# Allegro board HUB_DEBUG.brd
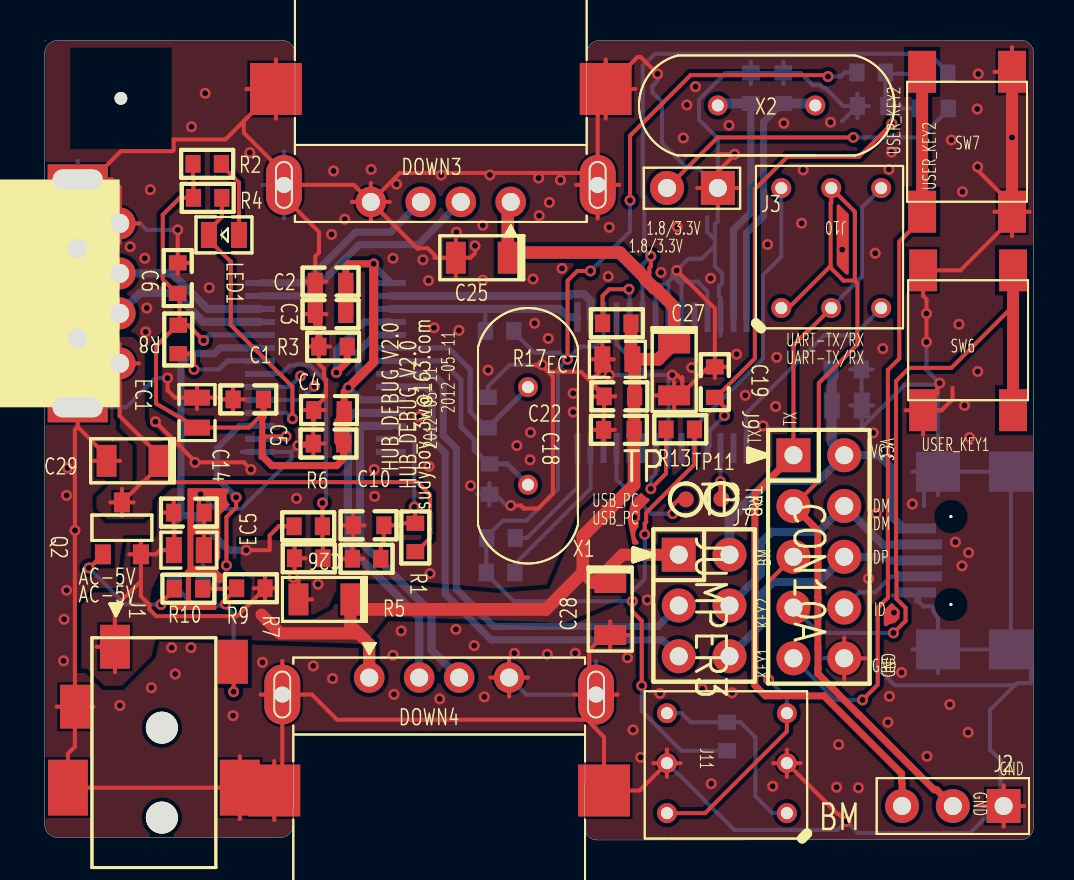
[diagram p0: board, top side]
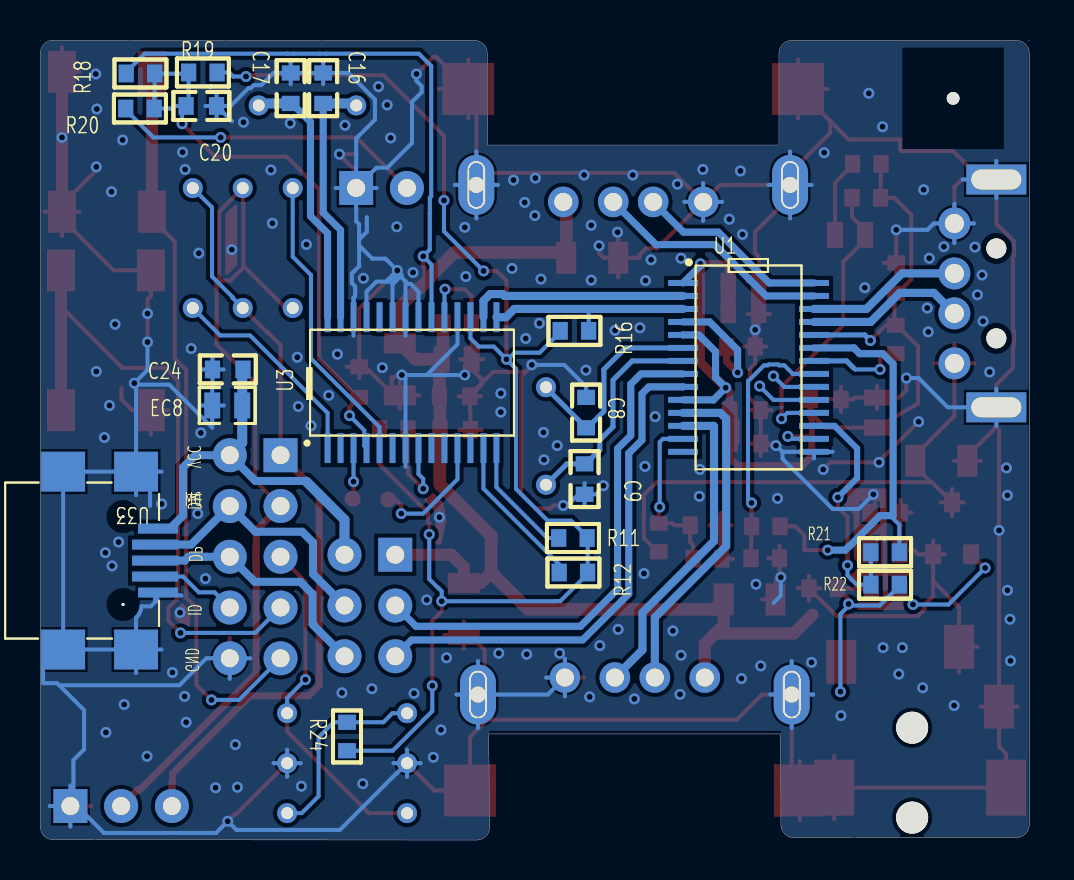
[diagram p1: board, bottom side, seen from below]

Outline 49.48 x 40.03 mm; copper layers: TOP, BOTTOM. Coordinates in mm from the lower left corner of the outline.
Outline path: 0,40 0.05,40 ; 49.48,40.03 49.48,40.02 ; 0,39.37 arc(0.19,39.82) 0.63,40 11.89,40.01 arc(12.34,39.82) 12.52,39.37 12.52,34.77 27.1,34.77 27.12,39.37 arc(27.31,39.82) 27.76,40 48.84,40.02 arc(49.29,39.83) 49.48,39.38 49.48,0.65 arc(49.29,0.2) 48.84,0.02 27.64,0 arc(27.19,0.19) 27.01,0.64 27.05,5.31 12.45,5.31 12.42,0.75 arc(12.24,0.31) 11.79,0.12 0.63,0.13 arc(0.19,0.31) 0,0.76 0,39.37

## Placement (name value [footprint] x y rotation side)
C1  0.1uF  [C0603]  10.19 22.05 0 top
C2  0.1uF  [C0603]  14.3 27.94 0 top
C3  0.1uF  [C0603]  14.3 26.31 0 top
C4  1uF  [C0603]  14.22 21.51 0 top
C5  0.1uF  [C0603]  14.2 19.84 0 top
C6  0.1uF  [C0603]  6.65 28.12 270 top
C8  20P  [C0603]  22.17 21.39 270 bottom
C9  20P  [C0603]  22.25 18.06 90 bottom
C10  0.1uF  [C0603]  16.21 15.75 0 top
C14  0.1uF  [C0603]  7.21 16.38 180 top
C16  20P  [C0603]  35.33 37.62 270 bottom
C17  20P  [C0603]  36.96 37.62 270 bottom
C18  0.1uF  [C0603]  28.73 20.52 0 top
C19  0.1uF  [C0603]  33.53 22.91 270 top
C20  0.1uF  [C0603]  41.43 36.73 0 bottom
C22  0.1uF  [C0603]  28.75 22.2 0 top
C24  0.1uF  [C0603]  40.11 23.55 180 bottom
C25  47uF  [CAP1206]  21.87 29.13 180 top
C26  47uF  [CAP1206]  14 12.04 180 top
C27  47uF  [CAP1206]  31.5 23.55 270 top
C28  47uF  [CAP1206]  28.3 11.56 270 top
C29  47uF  [CAP1206]  4.39 18.97 180 top
DOWN3  -  [USBH]  23.32 31.93 180 top
DOWN4  -  [USBH]  16.24 8.13 0 top
DOWN5  PC  [USBB-B]  3.75 23.85 270 top
EC1  10uF  [C0805]  7.62 21.39 90 top
EC5  10uF  [C0805]  7.21 14.5 0 top
EC7  10uF  [C0805]  28.65 24.05 180 top
EC8  10uF  [C0805]  40.13 21.74 0 bottom
J1  DC  [DC-PJK-111]  5.86 1.12 90 top
J2  CON3  [JUMP-3]  47.98 1.7 270 top
J3  UART_CNF  [JUMP-2]  33.68 32.63 180 top
J7  JUMPER3  [HDR254M-2X3]  31.72 14.27 270 top
J9  CON10A  [HDR254M-2X5]  37.46 19.25 270 top
J10  RX/TX  [SW_2_8X8]  36.86 26.62 180 top
J11  Boot  [SW_2_8X8]  37.13 1.35 270 top
LED1  PWR_LED  [D0805]  8.97 30.28 180 top
NOREF  -  [unnamed]  3.81 37.11 0 top
Q2  IRLML6401  [SOT-23]  3.86 15.59 0 top
R1  10K  [R0603]  18.54 15.14 270 top
R2  470R  [R0603]  8.13 33.83 180 top
R3  680R/1%  [R0603]  14.43 24.69 0 top
R4  100K  [R0603]  8.15 32.13 180 top
R5  47K  [R0603]  16.1 14.07 0 top
R6  10K  [R0603]  13.18 15.7 180 top
R7  20K  [R0603]  13.21 14.1 0 top
R8  1K  [R0603]  6.68 25.04 270 top
R9  510K  [R0603]  10.31 12.6 0 top
R10  4.7K  [R0603]  7.19 12.57 0 top
R11  4.7K  [R0603]  22.83 15.11 0 bottom
R12  4.7K  [R0603]  22.81 13.39 0 bottom
R13  0R/NC  [R0603]  31.8 20.55 180 top
R16  1.5K  [R0603]  22.76 25.48 180 bottom
R17  4.7K  [R0603]  28.63 25.86 180 top
R18  10K/NC  [R0603]  44.48 38.35 180 bottom
R19  10K  [R0603]  41.35 38.4 0 bottom
R20  12K  [R0603]  44.5 36.6 0 bottom
R21  4.7K  [R0603]  7.21 14.4 180 bottom
R22  0R/NC  [R0603]  7.21 12.78 0 bottom
R24  10K/NC  [R0603]  34.14 5.18 270 bottom
SW6  KEY1  [K6X6_SMD]  49.2 28.01 270 top
SW7  KEY2  [K6X6_SMD]  49.15 37.94 270 top
TP8  TP  [TP80]  33.86 17.07 0 top
TP11  TP  [TP80]  32.08 17.04 0 top
U1  GL850AUSB  [GL850AUSB_SSOP28]  17.32 27.87 180 bottom
U3  -  [PL2303-HX-SSOP]  35.11 19.61 90 bottom
U33  MID  [MINIUSB-5PIN]  45.34 11.78 270 bottom
X1  12MHz  [49SS]  24.18 22.66 270 top
X2  12MHz  [49SS]  38.56 36.75 180 top

## Library data of the parts
C1-C6 C8-C10 C14 C16-C20 C22 C24 = C-0603
C25-C29 = CAP: tolerance: +80%-20%
DOWN3 DOWN4 = USBA-A_1
DOWN5 = USBA-A_3
EC1 EC5 EC7 EC8 = CED-5-2_5
J1 = DC JACK_1
J2 = CON3
J3 = CON2
J7 = JUMPER3: User Part Number: partnum; Tolerance: RichardLC
J9 = CON10A: User Part Number: partnum; Tolerance: RichardLC
J10 J11 = SW_2
LED1 = LED-3mm_0
Q2 = PMOS
R1 R2 R4-R13 R16-R22 R24 = R-0603
R3 = R-0603 1%
SW6 SW7 = SW PUSHBUTTON-SPST-2/SM_1: room: KEYs
TP8 TP11 = T POINT R: User Part Number: partnum; Tolerance: RichardLC
U1 = GLI8024-48_3
U3 = PL-2303HX
U33 = USB-5PIN_1
X1 X2 = XD-49US-A

## Footprints (pads in the part's own frame, mm; a bottom-side part is the same pattern mirrored in y, then rotated)
49SS
  round 1 hole 0.6: 1(0,0) 2(4.88,0)
C0603
  rect 0.762x0.889 smd: 1(-0.762,0) 2(0.762,0)
C0805
  rect 0.8x1.3 smd: 1(-0.75,0) 2(0.75,0)
CAP1206
  rect 1x1.6 smd: 1(-1.299,0) 2(1.299,0)
D0805
  rect 0.8x1.3 smd: 1(-0.75,0) 2(0.75,0)
DC-PJK-111
  round 1.6 hole 1.6 unplated: (0,0) (4.5,0)
  rect 2.2x1.5 smd: 1(8.55,2.35) 2(5.55,4.35) 3(7.8,-3.55)
  rect 2.8x2 smd: 4(1.5,4.7) 5(1.5,-3.9)
GL850AUSB_SSOP28
  rect 1.5x0.3 smd: 1(0,0) 2(0,-0.65) 3(0,-1.3) 4(0,-1.95) 5(0,-2.6) 6(0,-3.25) 7(0,-3.9) 8(0,-4.55) 9(0,-5.2) 10(0,-5.85) 11(0,-6.5) 12(0,-7.15) 13(0,-7.8) 14(0,-8.45) 15(6.55,-8.45) 16(6.55,-7.8) 17(6.55,-7.15) 18(6.55,-6.5) 19(6.55,-5.85) 20(6.55,-5.2) 21(6.55,-4.55) 22(6.55,-3.9) 23(6.55,-3.25) 24(6.55,-2.6) 25(6.55,-1.95) 26(6.55,-1.3) 27(6.55,-0.65) 28(6.55,0)
HDR254M-2X3
  rect 1.7x1.7 hole 0.9: 1(0,0)
  round 1.7 hole 0.9: 2(0,2.54) 3(2.54,0) 4(2.54,2.54) 5(5.08,0) 6(5.08,2.54)
HDR254M-2X5
  rect 1.7x1.7 hole 0.9: 1(0,0)
  round 1.7 hole 0.9: 2(0,2.54) 3(2.54,0) 4(2.54,2.54) 5(5.08,0) 6(5.08,2.54) 7(7.62,0) 8(7.62,2.54) 9(10.16,0) 10(10.16,2.54)
JUMP-2
  rect 1.7x1.7 hole 0.9: 1(0,0)
  round 1.7 hole 0.9: 2(2.54,0)
JUMP-3
  rect 1.7x1.7 hole 0.9: 1(0,0)
  round 1.7 hole 0.9: 2(0,-2.54) 3(0,-5.08)
K6X6_SMD
  rect 2.1x1.4 smd: 1(-0.5,-0.75) 2(6.5,-0.75) 3(-0.5,-5.25) 4(6.5,-5.25)
MINIUSB-5PIN
  round 0.15 hole 0.9 unplated: (-4.4,0) (0,0)
  rect 0.5x2 smd: 1(-3.8,1.6) 5(-0.6,1.6)
  rect 0.5x2.3 smd: 2(-3,1.6) 3(-2.2,1.6) 4(-1.4,1.6)
  rect 2x2.2 smd: 6(-6.65,0.65) 7(2.25,0.65) 8(2.25,-3) 9(-6.65,-3)
PL2303-HX-SSOP
  rect 1.5x0.3 smd: 1(0,0) 2(0,-0.65) 3(0,-1.3) 4(0,-1.95) 5(0,-2.6) 6(0,-3.25) 7(0,-3.9) 8(0,-4.55) 9(0,-5.2) 10(0,-5.85) 11(0,-6.5) 12(0,-7.15) 13(0,-7.8) 14(0,-8.45) 15(6.55,-8.45) 16(6.55,-7.8) 17(6.55,-7.15) 18(6.55,-6.5) 19(6.55,-5.85) 20(6.55,-5.2) 21(6.55,-4.55) 22(6.55,-3.9) 23(6.55,-3.25) 24(6.55,-2.6) 25(6.55,-1.95) 26(6.55,-1.3) 27(6.55,-0.65) 28(6.55,0)
R0603
  rect 0.762x0.889 smd: 1(-0.712,0) 2(0.712,0)
SOT-23
  rect 0.8x1 smd: 1(-0.95,-1.3) 2(0.95,-1.3) 3(0,1.3)
SW_2_8X8
  round 1 hole 0.6: 1(0,0) 2(-2.5,0) 3(-5,0) 4(0,-6) 5(-2.5,-6) 6(-5,-6)
TP80
  round 0.8 smd: 1(0,0)
unnamed
  round 0.635 hole 3.175 unplated: (0,0)
USBB-B
  round 1 hole 1.15 unplated: (-5.75,-2.1) (-1.25,-2.1)
  round 1.6 hole 0.95: 1(0,0) 2(-2.5,0) 3(-4.5,0) 4(-7,0)
  rect 1.5x3 hole 1x2.5: 5(2.2,-2.1) 6(-9.2,-2.1)
USBH
  round 1.53 hole 0.9: 1(0,0) 2(2.5,0) 3(4.5,0) 4(7,0)
  oval 1.8x3 hole 0.8: 5(11.35,-0.85) 6(-4.35,-0.85)
  rect 2.6x2.6 smd: 7(11.75,-5.65) 8(-4.75,-5.65)

## Nets
AVDD: C1.2 C2.2 C3.2 C4.2 C5.2 C6.2 EC1.1 R2.2 R4.2 R8.1 U1.1(AVDD1) U1.5(AVDD2) U1.10(AVDD3) U1.16(DVDD) U1.24(V33)
DGND: C1.1 C2.1 C3.1 C4.1 C5.1 C6.1 C8.1 C9.1 C10.1 C14.1 C16.1 C17.1 C18.1 C19.1 C20.1 C22.1 C24.1 C25.2 C26.2 C27.2 C28.2 C29.2 DOWN3.4(GND) DOWN3.5(HAND1) DOWN3.6(HAND2) DOWN3.7(HAND3) DOWN3.8(HAND4) DOWN4.4(GND) DOWN4.5(HAND1) DOWN4.6(HAND2) DOWN4.7(HAND3) DOWN4.8(HAND4) DOWN5.4(GND) DOWN5.5(HAND1) DOWN5.6(HAND2) EC1.2 EC5.2 EC7.2 EC8.2 J1.2(3T) J1.4(HAND1) J1.5(HAND2) J2.1 J3.1 J9.10 J11.2 J11.5 R3.1 R5.1 R7.1 SW6.3 SW6.4 SW7.1 SW7.2 U1.15(GND) U3.7(GND#7) U3.18(GND#18) U3.21(NC2) U3.22(GP0) U3.23(GP1) U3.25(GND#25) U3.26(TEST) U33.5(GND) U33.6(SHGND1) U33.7(SHGND2) U33.8(SHGND3) U33.9(SHGND4)
VCC: C14.2 C18.2 C22.2 C25.1 C26.1 C27.1 C28.1 DOWN3.1(VCC) DOWN4.1(VCC) EC5.1 EC7.1 J1.1(1S) J7.1 Q2.2(SOURCE) R6.2 R9.2 R17.1 R18.1 R21.2 U1.23(V5) U3.20(VDD_5)
VDD3: R11.1 R12.1 R13.1 R16.1 R19.1 R24.2 U3.17(VO_33)
VDD_325: C19.2 C20.2 R18.2 R19.2 R20.1 U3.4(VDD_325)
B_VCC: C29.1 DOWN5.1(VCC) Q2.3(DRAIN) R1.2
BOOT: J9.5 J11.3 J11.4
CTS: TP11.1(TP) U3.11(CTS_N)
DC_DET: J1.3(2TS) R9.1 R10.2 R22.1
DCD: U3.10(DCD_N)
DM0: DOWN5.2(D-) U1.25(DM0)
DM1: DOWN3.2(D-) U1.27(DM1)
DM2: U1.2(DM2) U3.16(DM)
DM3: J7.3 U1.8(DM3)
DM4: DOWN4.2(D-) U1.11(DM4)
DP0: DOWN5.3(D+) U1.26(DP0)
DP1: DOWN3.3(D+) U1.28(DP1)
DP2: R16.2 U1.3(DP2) U3.15(DP)
DP3: J7.5 U1.9(DP3)
DP4: DOWN4.3(D+) U1.12(DP4)
DSR: U3.9(DSR_N)
DTR: U3.2(DTR_N)
OTG_DM: J7.4 J9.4 U33.2(D-)
OTG_DP: J7.6 J9.6 U33.3(D+)
OTG_ID: J9.8 U33.4(ID)
OTG_VDD: C24.2 EC8.1 J7.2 J9.2 U33.1(VCC)
OVCUR1#: R6.1 R7.2 U1.21(OVCUR1#)
PGANG: LED1.2 R4.1 U1.18(PGANG)
PSELF: R21.1 R22.2 U1.17(PSELF)
PWREN1: R8.2 U1.22(PWREN1)
RESET#: C10.2 R1.1 R5.2 U1.13(RESET#)
RI_N: U3.6(RI_N)
RREF: R3.2 U1.4(RREF)
RTS: TP8.1(TP) U3.3(RTS_N)
RXD: J10.4 U3.5(RXD)
RXD_J: J2.2 J9.3 J10.1 J10.5
SHTD: U3.12(SHTD_N)
TEST: U1.14(TEST)
TXD: J10.3 U3.1(TXD)
TXD_J: J2.3 J9.1 J10.2 J10.6
UART_CNF: J3.2 R20.2
USERKEY1: J9.7 SW6.1 SW6.2
USERKEY2: J9.9 SW7.3 SW7.4
X1: C8.2 U1.6(XTAL1) X1.1
X2: C9.2 U1.7(XTAL2) X1.2
N15274073: Q2.1(GATE) R10.1
N15289456: LED1.1 R2.1
N15714660: R12.2 U3.13(GP3)
N15714664: R11.2 U3.14(GP2)
N15714728: R17.2 U3.19(RESET_N)
N15714842: C16.2 U3.27(NC4) X2.2
N15714846: C17.2 U3.28(RESERVED) X2.1
N15715922: R13.2 U3.8(NC1)
N15756342: J11.1 J11.6 R24.1

Pads without a net: U1 19 20; U3 24

## Via types
v1: diameter 0.55, hole 0.3, TOP to BOTTOM, 195 vias

## Routing (per net, layer and track width the routed paths; a pad name or vN(x,y) marks a point on that pad's centre or on a via; arc(x,y) is an arc through that point)
AVDD: length 56.3
  TOP w0.203: R2.2 7.42,33.16 7.44,33.13 R4.2 6.76,32.13 5.91,31.28 5.91,28.04 6.59,27.36 C6.2 6.72,27.36 6.74,27.33 6.74,25.76 ; 6.74,25.76 R8.1 6.62,25.76 5.57,24.71 5.57,21.84 EC1.1 10.21,20.64 10.95,21.37 ; 6.74,25.76 7.19,25.76 v1(7.95,24.99) ; 10.88,20.17 10.91,20.2 v1(12.08,20.2)
  TOP w0.3: C1.2 10.95,21.16 10.88,21.09 10.88,20.17
  TOP w0.356: v1(15.19,22.63) 14.99,22.43 C4.2 ; C2.2 15.06,28.69 15.2,28.83 v1(16.46,28.83) ; 10.88,20.17 10.88,19.21 11.36,18.73 14.6,18.73 14.96,19.09 C5.2
  TOP w0.457: v1(15.19,22.63) 16.46,23.9 v1(16.46,28.83)
  TOP w0.762: C3.2 C2.2 ; C5.2 14.96,19.9 14.86,20 14.86,20.87 14.99,20.99 C4.2
  BOTTOM w0.203: U1.16 12.02,20.07 12.08,20.13 v1(12.08,20.2)
  BOTTOM w0.254: v1(7.95,24.99) 8.23,25.27 10.77,25.27 U1.24
  BOTTOM w0.356: U1.5 17.32,25.27 16.53,25.27 15.7,24.44 15.7,23.14 v1(15.19,22.63) 15.8,22.02 U1.10 ; v1(16.46,28.83) 16.46,28.73 U1.1
DGND: length 542.5
  TOP w0.203: J1.5 11.34,2.62 DOWN4.8 ; J1.5 9.76,1.04 ; J1.5 J1.4 1.16,4.33 1.51,4.68 J1.2 ; J1.5 9.76,4.2 ; 43.07,21.51 SW6.4 ; SW6.4 43.95,21.63 44.66,22.34 44.66,22.74 v1(44.78,22.86) ; SW6.4 44.83,21.51 ; SW6.4 43.95,20.28 ; SW6.4 44.88,21.51 45.42,22.05 45.42,22.62 ; C10.1 15.44,16.37 ; C10.1 14.88,15.75 ; C10.1 16,15.75 ; C10.1 15.44,14.8 15.39,14.74 R5.1 ; C22.1 27.99,22.26 26.83,23.42 25.19,23.42 ; C22.1 27.41,22.78 27.41,23.06 27.9,23.56 EC7.2 ; C22.1 27.43,22.2 ; C22.1 27.99,21.53 27.97,21.5 C18.1 ; C22.1 28.55,22.2 ; v1(10.31,18.54) 9.96,18.9 8.87,18.9 v1(7.52,18.9) 7.52,18.95 v1(5.54,20.93) ; C4.1 14.02,21.51 ; C4.1 13.44,21.49 13.44,19.9 ; C4.1 12.9,21.51 ; C4.1 13.46,20.89 ; C4.1 13.46,21.58 14.07,22.18 14.07,23.02 13.97,23.12 13.97,23.57 13.72,23.83 R3.1 ; SW7.2 49.28,31.44 ; SW7.2 48.4,32.66 ; SW7.2 47.52,31.44 ; SW7.2 48.4,30.21 ; SW7.2 48.4,31.09 45.82,28.51 SW6.3 43.95,27.23 44.12,27.06 v1(44.12,26.34) v1(44.12,24.92) ; 22.29,8.13 DOWN4.4 ; DOWN4.4 24.18,8.13 ; DOWN4.4 23.24,7.19 ; DOWN4.4 23.24,9.07 ; 13.54,27.94 13.54,29.21 13.72,29.39 13.72,30.42 11.97,32.18 DOWN3.5 ; 13.54,27.94 14.1,27.94 ; 13.54,27.94 12.98,27.94 ; J2.1 47.98,2.73 ; J2.1 49.01,1.7 ; J2.1 47.98,0.67 ; J2.1 46.95,1.7 ; DOWN4.6 11.89,8.96 ; DOWN4.6 13.37,7.28 14.63,6.02 27.12,6.02 ; DOWN4.6 11.89,2.88 DOWN4.8 ; DOWN4.6 10.81,7.28 ; 24.84,23.77 25.19,23.42 ; 24.84,23.77 24.82,23.75 24.56,23.75 24.59,23.77 24.84,23.77 ; 24.84,23.77 v1(24.89,23.77) ; 25.19,23.42 25.43,23.19 25.43,17.32 24.69,16.59 23.97,16.59 23.82,16.74 v1(23.32,16.74) ; J9.10 40,10.12 ; J9.10 41.03,9.09 ; J9.10 40,8.06 ; 10.09,37.58 DOWN3.7 ; DOWN3.7 9.96,35.97 ; DOWN3.7 11.57,39.06 ; DOWN3.7 11.57,36.1 ; J11.2 39.69,1.3 39.75,1.3 v1(40.11,0.94) ; J11.2 37.81,3.85 ; J11.2 37.13,3.17 ; J11.2 37.13,4.52 ; J11.2 36.46,3.85 ; v1(28.24,23.27) 28.24,23.71 28.22,23.73 ; 2.42,18.97 C29.2 ; C29.2 3.77,18.97 ; C29.2 3.09,19.22 1.65,20.67 ; 27.12,6.02 27.59,6.49 DOWN4.5 ; 27.12,6.02 27.99,5.15 DOWN4.7 29.77,2.48 J11.5 ; 9.96,35.97 9.96,35.38 11.97,33.38 DOWN3.5 ; 9.96,35.97 9.04,35.05 6.45,35.05 6.45,34.53 6.39,34.47 3.81,34.47 2.4,33.05 ; 27.41,20.52 C18.1 ; C18.1 28.52,20.52 ; C18.1 27.97,19.9 ; 48.4,31.79 46.69,33.5 v1(46.69,33.68) ; C6.1 6.59,28.88 ; C6.1 v1(6.65,30.53) ; C6.1 7.28,28.88 ; C6.1 6.65,28.32 ; DOWN3.8 27.67,37.18 27.67,33.38 ; DOWN3.8 29.55,37.58 ; DOWN3.8 28.07,39.06 ; DOWN3.8 28.07,36.1 ; DOWN3.8 29.67,39.18 29.81,39.18 v1(30.66,38.33) ; 1.65,20.67 DOWN5.5 1.65,22.79 0.81,23.62 0.81,24.69 0.77,24.74 0.77,25.46 0.81,25.51 0.81,29.19 0.77,29.24 0.77,29.96 1.65,30.84 DOWN5.6 2.4,33.05 ; 1.65,20.67 1.51,20.54 v1(1.51,15.49) J1.2 ; 30.52,22.25 C27.2 ; C27.2 31.8,22.25 33.22,23.67 C19.1 ; C27.2 31.9,22.65 31.9,23.01 ; C27.2 31.5,21.57 ; C27.2 31.5,22.92 ; 2.77,30.85 DOWN5.4 ; DOWN5.4 3.75,29.87 ; DOWN5.4 3.75,32.68 3.38,33.05 2.4,33.05 ; DOWN5.4 4.72,30.85 ; 13.16,24.69 R3.1 ; R3.1 14.27,24.69 ; 48.4,37.21 SW7.1 ; SW7.1 48.4,39.66 ; SW7.1 47.52,38.44 ; v1(6.15,23.11) 6.15,22.51 6.52,22.14 EC1.2 ; 31.13,3.17 J11.5 ; J11.5 31.81,3.85 ; J11.5 31.13,4.52 ; J11.5 30.46,3.85 ; C5.1 13.34,19.74 v1(12.67,19.74) ; C5.1 14,19.84 ; C5.1 12.73,19.84 12.67,19.79 12.65,19.79 ; C5.1 13.44,19.21 ; v1(7.8,17.3) 7.72,17.22 7.72,16.64 C14.1 7.98,15.71 7.96,15.7 EC5.2 ; 20.57,28.16 C25.2 ; C25.2 20.57,30.11 ; C25.2 21.3,29.13 21.53,29.36 v1(21.53,29.73) ; C25.2 19.5,29.13 19.5,29.27 19.16,29.61 18.68,29.61 18.66,29.59 DOWN3.4 ; DOWN3.5 15.47,32.78 DOWN3.4 ; 28.3,9.58 C28.2 ; C28.2 28,10.26 27.25,9.51 27.25,8.26 27.59,7.92 DOWN4.5 ; C28.2 29.27,10.26 ; C28.2 28.3,10.93 ; DOWN4.8 11.49,1 ; DOWN4.8 11.49,3.96 ; 0.58,6.67 J1.2 ; J1.2 2.44,6.67 ; DOWN3.4 17.77,33.38 27.67,33.38 ; DOWN3.4 15.37,31.93 ; DOWN3.4 16.32,30.98 ; DOWN3.4 17.26,31.93 ; DOWN3.4 16.32,32.87 ; R7.1 12.5,14.72 ; R7.1 13.05,14.1 ; R7.1 12.5,13.47 ; DOWN3.6 28.75,32.78 ; DOWN3.6 27.67,33.38 ; DOWN3.6 26.59,32.78 ; DOWN3.6 27.67,31.1 ; EC7.2 27.9,24.88 ; EC7.2 28.22,23.73 ; EC7.2 27.32,24.05 ; EC7.2 28.48,24.05 ; J3.1 33.68,33.45 34.54,34.31 v1(34.52,34.31) 33.66,34.31 ; J3.1 33.68,31.6 ; J3.1 32.65,32.63 ; J3.1 34.71,32.63 ; 7.62,21.56 EC1.2 ; EC1.2 8.72,22.14 8.81,22.05 C1.1 ; EC1.2 7.62,22.71 ; 31.9,23.01 31.9,23.16 ; 31.9,23.01 31.65,23.27 v1(31.39,23.27) ; C1.1 9.42,22.67 ; C1.1 9.42,21.42 ; C1.1 9.98,22.05 ; DOWN4.5 28.66,7.28 ; DOWN4.5 26.51,7.28 ; 13.54,25.69 13.54,26.31 ; 13.54,26.31 12.98,26.31 ; 13.54,26.31 14.1,26.31 ; 28.22,23.73 28.22,23.16 ; R5.1 15.95,14.07 ; R5.1 15.39,14.01 ; R5.1 14.83,14.07 ; v1(31.62,28.5) 33.53,26.59 C19.1 ; 33.53,23.11 C19.1 ; C19.1 34.15,23.67 ; 13.37,12.04 C26.2 12.7,13.02
  TOP w0.356: R3.1 v1(13.72,25.53) 13.72,26.14 13.54,26.31
  TOP w0.6: SW7.1 v1(48.4,35.15) SW7.2
  TOP w0.762: C5.1 13.44,19.9 ; 13.54,26.31 13.54,27.94
  BOTTOM w0.203: C20.1 41.22,36.73 ; C20.1 39.96,36.73 39.07,37.62 38.95,37.62 38.8,37.77 38.43,37.77 37.82,38.38 C17.1 ; C20.1 40.67,36.11 ; C20.1 39.9,35.97 39.9,35.97 ; C20.1 40.67,37.35 ; 27.67,31.1 DOWN3.6 ; DOWN3.6 28.75,32.78 ; DOWN3.6 27.67,34.46 ; DOWN3.6 26.59,32.78 ; 15.37,31.93 DOWN3.4 ; DOWN3.4 16.32,32.87 ; DOWN3.4 16.32,30.98 ; DOWN3.4 17.26,31.93 ; U3.7 31.21,23.08 v1(31.39,23.27) 30.15,23.27 ; U3.7 31.21,20.54 ; U3.7 31.21,18.68 ; U3.21 30.56,27.44 30.94,27.82 31.08,27.82 31.42,28.16 31.42,28.29 v1(31.62,28.5) ; DOWN4.5 27.59,8.96 ; DOWN4.5 28.66,7.28 ; DOWN4.5 27.59,5.6 ; DOWN4.5 24.09,7.28 DOWN4.4 ; 12.8,11.86 12.43,12.23 v1(12.43,13.14) ; U3.25 33.16,27.44 33.08,27.53 33.08,27.53 32.74,27.86 32.66,27.94 32.13,27.94 ; 31.86,27.8 U3.23 ; 31.86,27.8 31.86,28.26 ; 31.86,27.8 31.72,27.94 ; 43.99,16.71 43.99,17.73 U33.6 ; 44.69,8.35 U33.7 ; U33.7 43.42,9.53 ; U33.7 U33.8 ; U33.7 44.69,11.12 44.62,11.19 44.52,11.34 44.45,11.51 44.42,11.69 43.96,11.69 43.74,11.9 U33.5 ; J2.1 49.01,1.7 ; J2.1 47.65,1.7 ; J2.1 47.98,2.73 ; J2.1 47.98,0.67 ; 9.84,19.42 U1.15 ; U1.15 12.34,19.42 ; U1.15 10.77,19.09 ; J3.1 34.71,32.63 ; J3.1 33.68,35.1 32.74,36.04 32.74,37.05 34.07,38.38 C16.1 ; J3.1 33.68,31.55 33.68,31.54 33.68,30.95 33.53,30.81 33.53,30.05 ; J3.1 32.65,32.63 ; J3.1 32.67,33.64 32.12,33.64 30.89,34.87 30.89,36.93 30.4,37.41 30.4,37.72 30.66,37.98 v1(30.66,38.33) ; 38.98,9.09 J9.10 ; J9.10 41.17,9.09 42.52,7.75 48.54,7.75 ; J9.10 40,8.06 ; 31.21,25.23 U3.22 ; U3.22 31.21,27.09 ; U3.22 31.21,27.95 ; J11.5 31.65,3.33 31.67,3.33 34.49,0.51 39.67,0.51 v1(40.11,0.94) 40.69,0.35 46.3,0.35 47.65,1.7 ; J11.5 31.13,4.52 ; J11.5 31.13,3.17 ; J11.5 31.81,3.85 ; J11.5 30.46,3.85 ; 31.72,27.94 32.13,27.94 ; 31.72,27.94 31.42,28.24 ; 31.72,27.94 31.72,28.4 ; 32.13,27.94 32.13,27.99 31.86,28.26 ; 12.34,19.42 12.34,19.07 9.83,16.56 8.53,16.56 v1(7.8,17.3) ; 12.34,19.42 12.66,19.74 v1(12.67,19.74) ; C24.1 41.43,23.55 ; C24.1 40.87,22.63 40.88,22.62 EC8.2 ; C24.1 40.87,24.17 ; C24.1 40.31,23.55 ; 30.15,23.27 28.61,24.8 U3.18 ; 30.15,23.27 v1(28.24,23.27) ; v1(24.89,23.77) 23.27,23.77 22.17,22.68 C8.1 ; 48.54,7.75 47.29,6.5 47.29,4.53 47.83,4 47.83,1.88 47.65,1.7 ; 48.54,7.75 48.64,7.85 49.35,7.85 49.35,8.71 47.85,8.71 47.85,9.04 U33.8 ; DOWN4.4 23.24,7.19 ; DOWN4.4 23.24,9.07 ; DOWN4.4 24.18,8.13 ; C16.1 35.33,38.94 ; C16.1 35.33,37.82 ; C16.1 C17.1 ; 11.89,5.6 DOWN4.6 ; DOWN4.6 10.81,7.28 ; DOWN4.6 12.96,7.28 ; DOWN4.6 11.89,8.96 ; DOWN5.5 4.07,21.65 5.54,23.11 v1(6.15,23.11) ; DOWN5.5 1.65,20.72 ; DOWN5.5 1.65,22.58 ; 33.15,31.17 33.15,30.43 33.53,30.05 ; DOWN5.6 3.32,33.05 ; DOWN5.6 1.65,32.12 ; DOWN5.6 1.65,33.98 ; 31.72,28.4 31.86,28.26 ; 31.72,28.4 v1(31.62,28.5) ; U33.6 U33.9 U33.8 ; U33.6 43.42,18.43 ; U33.6 44.69,22.77 44.7,22.78 ; U33.6 44.69,17.25 ; 43.59,11.95 U33.5 ; U33.5 42.42,12.23 ; v1(31.62,28.5) 32.21,29.09 32.87,29.09 33.53,29.75 ; v1(23.32,16.74) 23.11,16.74 22.56,17.3 C9.1 ; DOWN3.5 13.05,32.78 ; DOWN3.5 11.97,34.46 ; DOWN3.5 10.89,32.78 ; DOWN3.5 11.97,31.1 ; 40.3,21.74 EC8.2 ; EC8.2 41.46,21.74 ; EC8.2 40.88,20.64 43.03,22.78 44.7,22.78 ; C17.1 36.96,37.82 ; C17.1 36.96,38.94 ; 44.7,22.78 v1(44.78,22.86) 44.12,23.52 v1(44.12,24.92) ; 33.53,29.75 33.53,28.71 33.81,28.43 33.9,28.35 33.9,27.86 33.73,27.7 33.73,27.22 33.81,27.14 U3.26 ; 33.53,29.75 33.53,30.05 ; J11.2 37.81,3.85 ; J11.2 37.13,4.52 ; J11.2 37.13,3.17 ; J11.2 36.46,3.85 ; U3.26 33.81,27.09 ; U3.26 33.81,25.23 ; 2.77,30.85 DOWN5.4 ; DOWN5.4 4.78,30.85 5.09,30.53 v1(6.65,30.53) ; DOWN5.4 3.75,29.87 ; DOWN5.4 3.75,31.83 ; C9.1 22.25,17.86 ; C9.1 22.25,16.74 ; C9.1 21.63,17.3
  vias: v1(0.94,8.97) v1(0.97,11.05) v1(1.14,18.62) v1(1.09,17.25) v1(1.09,12.5) v1(1.98,23.42) v1(2.31,25.96) v1(2.36,28.27) v1(2.59,27.28) v1(2.72,29.67) v1(3.76,6.73) v1(4.27,29.68) v1(5,29.11) v1(5.05,25.42) v1(5.11,26.62) v1(5.28,32.54) v1(5.33,7.62) v1(6.35,9.63) v1(6.53,8.31) v1(7.34,35.69) v1(7.32,9.63) v1(8.03,37.36) v1(8.23,27.63) v1(9.42,6.22) v1(10.26,34.39) v1(10.9,8.89) v1(12.6,17.09) v1(13.44,8.71) v1(13.67,12.8) v1(14.35,30.3) v1(14.45,33.48) v1(14.4,8.08) v1(15.01,31.06) v1(16.33,33.55) v1(16.48,18.54) v1(16.51,17.2) v1(17.42,29.11) v1(17.42,9.24) v1(17.48,7.29) v1(17.6,32.82) v1(17.83,10.46) v1(18.72,21.18) v1(18.92,29.03) v1(19.2,27.99) v1(19.23,18.69) v1(19.28,13.33) v1(19.48,25.63) v1(19.84,33.27) v1(19.76,7.06) v1(20.6,30.41) v1(20.57,10.54) v1(20.73,25.5) v1(21.31,17.73) v1(21.49,9.73) v1(21.92,30.76) v1(21.92,28.02) v1(22,7.16) v1(22.18,23.51) v1(22.28,33.27) v1(23.5,9.34) v1(23.62,19.74) v1(24.31,20.4) v1(24.28,19.02) v1(24.43,28.07) v1(24.51,25.86) v1(24.71,33.12) v1(24.74,31.24) v1(25.15,9.3) v1(25.25,31.9) v1(25.2,25.09) v1(25.81,33.02) v1(25.88,28.6) v1(26.44,22.35) v1(26.44,21.41) v1(26.54,9.35) v1(28.24,30.66) v1(28.19,28.19) v1(29.16,9.12) v1(29.44,5.51) v1(29.51,16.15) v1(29.82,4.14) v1(30.15,12.01) v1(30.84,28.4) v1(30.78,7.34) v1(31.65,30.68) v1(31.95,35.13) v1(32.13,36.78) v1(32.37,23.63) v1(32.56,37.69) v1(32.89,7.57) v1(33.32,28.11) v1(33.35,2.82) v1(34.24,35.76) v1(34.39,7.37) v1(34.62,24.31) v1(35.05,22.25) v1(35.94,20.73) v1(36.17,29.79) v1(36.42,2.69) v1(36.63,24.15) v1(36.58,21.69) v1(36.98,35.86) v1(37.95,33.53) v1(37.87,30.86) v1(39.32,35.91) v1(39.62,2.64) v1(39.73,4.77) v1(39.9,29.54) v1(40.72,2.62) v1(41.22,13.08) v1(41.45,20.37) v1(41.55,29.36) v1(41.61,16.33) v1(41.94,24.59) v1(42.24,33.55) v1(42.19,5.89) v1(42.27,7.19) v1(42.37,34.42) v1(42.49,11.38) v1(42.88,8.38) v1(43.41,16.81) v1(44.15,4.19) v1(45.29,6.78) v1(45.36,35.03) v1(45.57,14.91) v1(45.75,25.81) v1(45.92,32.44) v1(45.9,13.72) v1(46.02,21.74) v1(46.23,14.38) v1(46.2,5.38) v1(46.28,20.14) v1(46.71,38.33) v1(46.66,36.58) v1(46.69,23.44)
VCC: length 135
  TOP w0.203: Q2.2 4.81,14.97 ; Q2.2 4.81,12.95 ; Q2.2 4.23,14.29 ; Q2.2 5.55,14.29 5.76,14.5 EC5.1 6.46,15.7 6.45,15.71 C14.2 ; R9.2 9.63,11.21 5.58,11.21 5.24,11.54 5.24,11.77 4.81,12.2 4.81,12.95 ; R9.2 10.47,12.6 ; R9.2 11.58,12.6 ; R9.2 11.02,13.22 ; R9.2 11.02,11.98 ; 9.93,14.36 10.07,14.5 v1(10.08,14.5) 11.23,14.5 11.25,14.53 11.25,15.24 11.71,15.7 R6.2 ; 4.81,12.95 3.51,11.65 J1.1 ; v1(30.33,29.21) 30.33,28.71 30.26,28.64 30.26,28.34 30.04,28.13 ; 5.89,16.38 C14.2 ; C14.2 6.45,17 ; J1.1 3.51,8.39 ; J1.1 3.51,10.95 ; J1.1 2.58,9.67
  TOP w0.6: J7.1 28.91,14.27 28.3,13.66 C28.1 27.45,12.86 26.92,13.39
  TOP w0.61: 15.7,10.34 15.29,10.74 C26.1 ; 15.7,10.34 11.79,10.34 10.85,11.28 ; 15.7,10.34 16.24,9.8 DOWN4.1
  TOP w0.635: 23.17,29.43 23.21,29.4 28.77,29.4 30.04,28.13 30.04,28.07 30.51,27.6 30.56,27.6 31.5,26.67 C27.1 30.7,24.05 EC7.1 ; 23.17,29.43 23.17,31.78 DOWN3.1 ; 23.17,29.43 C25.1 ; EC7.1 29.51,23.94 C22.2 29.49,22.17 C18.2 29.49,17.78 26.92,15.21 26.92,13.39 25.08,11.54 15.79,11.54 C26.1 ; EC7.1 29.34,24.12 R17.1
  BOTTOM w0.203: R21.2 6.5,15.78 6.81,16.09 6.81,16.23 ; R18.1 45.19,38.42 44.26,39.34 37.13,39.34 35.5,39.34 30.54,39.34 29.93,38.73 29.93,32.21 29.99,32.14 29.99,31.37 30,31.36 30,29.54 v1(30.33,29.21) 29.91,28.79 U3.20
  BOTTOM w0.356: v1(10.08,14.5) 9.21,14.5 9,14.71 8.99,14.71 8.38,15.32 8.38,15.32 7.47,16.23 6.81,16.23 6.81,23.82 7.33,24.33 8.48,24.33 8.77,24.62 U1.23
VDD3: length 73.8
  TOP w0.203: R13.1 32.51,18.8 30.09,16.38 30.09,15.91 30.02,15.84 v1(30.02,15.29) ; v1(26.16,24.05) 26.16,27.99 26.65,28.47 v1(27.3,28.47) ; v1(29.4,11.95) 29.4,11.44 29.87,10.97 v1(29.87,7.72) ; v1(39.19,38.2) 39.12,38.27 32.32,38.27 29.82,35.77 29.29,35.24 v1(29.29,32)
  BOTTOM w0.203: R24.2 31.85,4.47 29.87,6.45 v1(29.87,7.72) ; U3.17 27.96,25.1 27.54,24.69 26.8,24.69 v1(26.16,24.05) ; v1(27.3,28.47) 29.29,30.45 v1(29.29,32) ; v1(26.16,24.05) 25.68,23.57 25.68,17.56 24.09,15.98 22.92,15.98 22.12,15.18 R11.1 22.12,15.05 22.1,15.02 R12.1 22.1,13.32 23.46,11.96 23.68,11.96 23.69,11.95 v1(29.4,11.95) 29.4,12.45 29.55,12.6 29.57,12.6 30.02,13.05 v1(30.02,15.29) ; v1(26.16,24.05) 26.09,24.05 25.76,24.38 24.5,24.38 23.47,25.41 R16.1 ; v1(39.19,38.2) 39.83,38.2 40.03,38.4 R19.1
VDD_325: length 30.4
  TOP w0.203: v1(34.01,21.23) 34.01,21.67 C19.2 33.59,22.15 35.53,24.09 35.53,32.56 37.16,34.19 40.74,34.19 v1(42.39,35.84)
  BOTTOM w0.203: v1(42.39,35.84) 42.39,36.52 C20.2 ; U3.4 33.27,19.72 33.27,20.5 v1(34.01,21.23) ; C20.2 42.06,36.85 42.06,38.34 ; C20.2 42.8,36.73 42.93,36.6 R20.1 43.79,37.19 43.76,37.21 R18.2 43.75,38.34 42.06,38.34 ; 42.06,38.34 R19.2
B_VCC: length 31.8
  TOP w0.203: DOWN5.1 4.72,23.85 ; DOWN5.1 3.75,24.83 ; DOWN5.1 2.77,23.85 ; DOWN5.1 3.75,21.22 5.69,19.27 C29.1 5.69,18.67 4.93,17.91 ; R1.2 18.61,14.43 19.28,15.1 19.28,15.33 19.29,15.34 19.29,16.36 19.28,16.37 19.28,17.27 18.64,17.91 4.93,17.91 ; Q2.3 4.87,17.91 4.93,17.91 ; Q2.3 3.28,16.89 ; Q2.3 4.44,16.89 ; Q2.3 3.86,16.22 ; Q2.3 3.86,17.57
BOOT: length 17.3
  TOP w0.203: v1(36.22,8.03) 36.22,12.93 J9.5 ; J11.3 37.13,5.43 33.05,1.35 J11.4
  BOTTOM w0.203: v1(36.22,8.03) 37.13,7.11 J11.3
CTS: length 6.3
  TOP w0.203: TP11.1 31.72,17.04 31.42,16.75 v1(31.42,16.33)
  BOTTOM w0.203: U3.11 28.61,18.05 30.33,16.33 v1(31.42,16.33)
DC_DET: length 11.8
  TOP w0.203: v1(9.04,11.81) 9.04,12.04 R9.1 8.99,12.6 8.97,12.57 R10.2 ; J1.3 9.43,8.92 9.45,8.9 v1(9.45,7.42)
  BOTTOM w0.203: 9.04,11.71 9.02,11.73 7.48,11.73 6.5,12.71 R22.1 ; 9.04,11.71 9.45,11.3 v1(9.45,7.42) ; 9.04,11.71 v1(9.04,11.81)
DM0: length 8.1
  BOTTOM w0.406: U1.25 7.94,25.92 6.48,27.38 4.77,27.38 DOWN5.2
DM1: length 12
  BOTTOM w0.356: DOWN3.2 18.68,29.79 15.74,29.79 13.17,27.22 U1.27
DM2: length 11
  BOTTOM w0.406: U3.16 27.31,26.98 26.98,27.32 26.34,27.32 26.25,27.22 U1.2
DM3: length 25.7
  BOTTOM w0.356: J7.3 30.68,10.69 22.45,10.69 20.6,12.55 20.6,19.58 19.94,20.24 19.94,22.81 19.43,23.32 U1.8
DM4: length 16.7
  BOTTOM w0.406: U1.11 15.45,21.37 15.16,21.08 15.16,14.71 18.74,11.13 DOWN4.2
DP0: length 7.8
  BOTTOM w0.406: DOWN5.3 6.37,28.35 8.15,26.57 10.77,26.57 U1.26
DP1: length 9.7
  BOTTOM w0.356: DOWN3.3 17.31,30.42 15.56,30.42 13.01,27.87 U1.28
DP2: length 10.6
  BOTTOM w0.203: 22.05,26.57 22.05,26.57 R16.2
  BOTTOM w0.406: U1.3 25.77,26.57 26.18,26.16 U3.15
DP3: length 25.5
  BOTTOM w0.356: J7.5 30.91,10.01 22.35,10.01 20.37,11.99 20.04,12.32 20.04,19.35 19.38,20.01 19.38,22.33 19.03,22.67 17.32,22.67 U1.9
DP4: length 16.2
  BOTTOM w0.406: U1.12 15.8,20.72 15.77,20.7 15.77,14.96 19.35,11.38 19.35,9.51 DOWN4.3
Net_1: length 3
  BOTTOM w0.203: 10.77,22.02 12.8,22.02 v1(13.49,22.71)
Net_2: length 2.3
  BOTTOM w0.203: 10.77,22.67 10.77,22.67 12.26,22.67 v1(12.8,23.21)
OTG_DM: length 13.3
  BOTTOM w0.4: U33.2 41.94,14.78 J9.4 38.72,15.43 36.38,15.43 35.84,14.88 35.84,13.31 J7.4
OTG_DP: length 12.5
  BOTTOM w0.4: J7.6 35.79,10.72 35.79,10.73 35.86,10.81 35.86,12.31 36.47,12.92 38.75,12.92 J9.6 41.18,14.17 42.08,14.17 42.27,13.98 U33.3
OTG_ID: length 4.4
  BOTTOM w0.203: U33.4 42.34,13.18 41.56,12.4 40.77,12.4 J9.8
OTG_VDD: length 20.1
  BOTTOM w0.4: 36.17,17.93 36.2,17.97 38.72,17.97 J9.2 41.73,19.25 42.34,18.64 42.34,16.23 42.99,15.58 U33.1
  BOTTOM w0.5: J9.2 39.38,19.88 EC8.1 39.38,23.44 39.34,23.48 C24.2 ; 36.17,17.93 34.26,16.03 J7.2
OVCUR1#: length 12.8
  TOP w0.203: R7.2 13.92,15 13.89,15.02 R6.1 v1(13.89,16.86)
  BOTTOM w0.203: v1(13.89,16.86) 14.07,17.04 14.07,22.95 13.27,23.75 13.09,23.75 13.04,23.79 12.56,23.79 12.51,23.75 12.25,23.75 11.83,23.32 U1.21
PGANG: length 14.8
  TOP w0.203: v1(12.4,21.08) 12.4,22.68 9.31,25.77 9.31,28.93 8.22,30.03 LED1.2 8.22,30.53 8.87,31.18 R4.1
  BOTTOM w0.203: v1(12.4,21.08) 12.1,21.37 U1.18
PSELF: length 12.6
  TOP w0.203: v1(9.09,13.74) 9.09,16.16 9.58,16.64 v1(9.58,17.14)
  BOTTOM w0.203: v1(9.09,13.74) 9.09,13.24 8.63,12.78 R22.2 R21.1 7.93,14.43
  BOTTOM w0.305: U1.17 9.74,20.72 8.61,19.6 8.61,18.11 v1(9.58,17.14)
PWREN1: length 5
  TOP w0.203: v1(7.47,23.55) 7.47,24.29 7.43,24.33 R8.2
  BOTTOM w0.203: 8.78,23.62 8.71,23.55 v1(7.47,23.55)
  BOTTOM w0.254: U1.22 10.77,23.97 9.14,23.97 8.78,23.62
RESET#: length 8.7
  TOP w0.203: R5.2 16.82,14.74 16.97,14.9 C10.2 17.77,15.75 17.87,15.85 R1.1 18.54,16.61 v1(18.49,16.66)
  BOTTOM w0.203: v1(18.49,16.66) 18.49,19.91 18.33,20.07 U1.13
RREF: length 6
  TOP w0.356: R3.2 15.14,23.94 v1(14.59,23.39)
  BOTTOM w0.356: U1.4 15.99,25.92 14.59,24.52 v1(14.59,23.39)
RTS: length 2.6
  TOP w0.203: v1(33.81,17.93) 33.81,17.11 TP8.1
  BOTTOM w0.203: U3.3 v1(33.81,17.93)
RXD: length 14.8
  BOTTOM w0.203: J10.4 36.86,29.18 35.94,28.27 35.94,24.09 32.51,20.66 U3.5
RXD_J: length 45
  TOP w0.203: 40.54,27.99 40.54,31.44 J10.5 39.36,31.89 39.32,31.86 39.32,28.73 ; 40.54,27.99 40.67,27.86 40.67,24.79 38.74,22.86 38.74,22.68 38.73,17.98 J9.3 ; 40.54,27.99 39.97,27.99 39.32,28.63 39.32,28.73 ; 39.32,28.73 37.22,26.62 J10.1
  TOP w0.35: J9.3 38.69,15.48 38.68,15.48 38.68,14.69 38.69,14.68 38.69,13.66 38.68,13.65 38.68,12.15 38.69,12.14 38.69,11.12 38.68,11.11 38.68,9.61 38.69,9.6 38.69,8.58 38.68,8.57 38.68,8.32 40.73,6.27 40.74,6.27 44.5,2.52 44.63,2.52 J2.2
TXD: length 10.7
  BOTTOM w0.203: J10.3 40.48,25.25 38.99,25.25 35.11,21.37 U3.1
TXD_J: length 38.3
  TOP w0.203: J9.1 37.46,24.76 38.13,25.42 38.16,25.42 J10.2
  TOP w0.35: J9.1 35.53,17.32 35.53,7.74 36.06,7.21 36.76,7.21 36.77,7.22 37.5,7.22 37.51,7.21 38.99,7.21 42.88,3.33 42.88,2.88 42.9,2.85 J2.3
  BOTTOM w0.203: J10.6 40.89,31.66 40.89,28.19 39.87,27.17 39.87,27.13 J10.2
UART_CNF: length 15.8
  TOP w0.203: v1(40.46,35.15) 33.67,35.15 J3.2
  BOTTOM w0.203: R20.2 45.21,36.54 43.83,35.15 v1(40.46,35.15)
USERKEY1: length 33
  TOP w0.203: v1(42.47,10.36) 43.07,10.97 43.07,11.62 42.62,12.07 42.62,13.41 42.6,13.43 42.6,22.96 43.26,23.62 45.36,23.62 48.45,26.71
  TOP w0.6: SW6.1 SW6.2
  BOTTOM w0.203: v1(42.47,10.36) 38.73,10.36 J9.7
USERKEY2: length 37
  TOP w0.203: v1(40.92,7.01) 41.68,7.77 41.68,10.99 41.68,11.61 42.19,12.12 42.19,23.13 42.19,23.52 42.76,24.09 42.76,29.95 43.9,31.09 SW7.4
  TOP w0.6: SW7.4 SW7.3
  BOTTOM w0.203: v1(40.92,7.01) 39.55,7.01 J9.9
X1: length 10.6
  BOTTOM w0.254: U1.6 20.21,24.62 21.29,23.55 21.29,21.45 22.11,20.62 C8.2 24.18,22.63 X1.1
X2: length 11.1
  BOTTOM w0.254: U1.7 17.32,23.97 19.87,23.97 20.83,23.01 20.83,20.67 21.49,20.01 21.49,19.52 22.19,18.82 C9.2 23.14,18.82 X1.2
N15274073: length 6.4
  TOP w0.203: v1(5.82,11.78) 5.82,11.86 6.48,12.52 R10.1 ; Q2.1 2.23,13.61 v1(2.21,13.61)
  BOTTOM w0.203: v1(5.82,11.78) 4.04,11.78 v1(2.21,13.61)
N15289456: length 3.9
  TOP w0.203: LED1.1 9.72,32.89 8.84,33.77 R2.1
N15714660: length 7.8
  BOTTOM w0.203: U3.13 27.31,17.58 23.52,13.79 R12.2
N15714664: length 6.1
  BOTTOM w0.203: U3.14 26.66,17.65 24.12,15.11 R11.2
N15714728: length 4.2
  TOP w0.203: R17.2 27.91,27.23 28.24,27.56 v1(29.24,27.56)
  BOTTOM w0.203: U3.19 29.26,27.53 v1(29.24,27.56)
N15714842: length 12.8
  BOTTOM w0.356: U3.27 34.46,30.52 35.33,31.39 C16.2
  BOTTOM w0.5: X2.2 33.78,36.85 C16.2
N15714846: length 13.1
  BOTTOM w0.356: C17.2 36.89,36.85 35.97,35.93 35.97,31.22 35.11,30.36 U3.28
  BOTTOM w0.5: C17.2 38.46,36.85 X2.1
N15715922: length 5.4
  TOP w0.203: R13.2 31.09,18.34 v1(30.33,17.57)
  BOTTOM w0.203: v1(30.33,17.57) 30.33,18.08 30.56,18.31 U3.8
N15756342: length 9.8
  BOTTOM w0.203: J11.6 31.86,6.35 32.32,5.89 R24.1 34.81,5.89 35.56,5.14 35.56,2.19 36.41,1.35 J11.1

## Copper pours and planes (outline as drawn; the poured copper is in the pictures)
DGND on TOP (solid shape): 39.69,31.81 39.72,31.81 39.75,31.8 40.23,31.31 40.23,28.35 40.22,28.31 40.18,28.3 40.09,28.3 39.63,28.76 39.63,31.73 39.66,31.76 39.66,31.78 39.68,31.8
DGND on TOP (solid shape): outline of 111 points within 5.96,11.51 9.27,17.6
DGND on TOP: outline of 1232 points within 0.03,0.03 49.45,39.99
DGND on BOTTOM: 27.64,0.03 27.21,0.21 27.04,0.64 27.08,5.34 12.42,5.34 12.39,0.75 12.22,0.33 11.79,0.15 0.63,0.16 0.21,0.33 0.03,0.76 0.03,39.37 0.21,39.8 0.64,39.97 11.89,39.98 12.32,39.8 12.49,39.37 12.49,34.74 27.13,34.74 27.15,39.37 27.33,39.8 27.76,39.97 48.84,39.99 49.27,39.81 49.45,39.38 49.45,0.65 49.27,0.23 48.84,0.05 ; 9 cut-outs
VCC on TOP: 1.9,8.58 2.11,8.58 2.97,7.72 3.86,7.72 5.33,9.19 5.56,10.16 16.03,9.8 17.12,11.18 26.06,10.87 28.83,12.06 29.41,13.36 29.49,13.33 28.96,16.05 29.17,17.16 27.56,17.04 26.9,16.43 25.25,12.57 22.61,12.37 17.98,12.78 16.13,12.83 14.91,12.78 14.38,11.53 13.51,11.07 12.88,11.02 12.01,11.05 11.91,11.58 11.86,14.96 11.58,15.01 9.8,15.01 9.8,13.72 10.29,13.11 10.37,13 10.26,11.76 10.24,11.76 9.63,11.3 5.52,11.3 5.21,11.76 5.36,12.57 5.87,13.61 6.88,13.61 6.93,13.66 6.93,17.68 6.4,17.65 5.61,16.89 5.61,15.21 5.44,15.04 4.11,15.04 3.78,12.52 3.66,12.39 2.46,12.39 1.83,11.76 1.83,8.56 1.88,8.56
B_VCC on TOP: 2.9,25.17 4.42,25.17 5,24.59 5,21.03 5.07,20.97 5.07,20.84 6.45,19.46 6.45,18.08 5.38,17.02 5.38,16.51 4.93,16.05 3.12,16.05 2.59,16.59 2.59,17.14 3.2,17.75 4.37,17.75 4.6,17.98 4.6,19.79 3.76,20.62 3.76,22.38 2.67,23.47 2.67,24.94
DGND on TOP (solid shape): 29.77,17.33 29.85,17.36 29.93,17.31 30.04,17.19 30.19,17.12 30.26,17.04 30.23,16.95 29.79,16.5 29.79,16.04 29.72,15.97 29.72,15.68 29.71,15.66 29.7,15.64 29.54,15.3 29.69,14.95 29.71,14.84 29.61,14.78 29.46,14.78 29.42,14.79 29.41,14.82 29.16,16.05 29.32,16.88

Small or netless copper shapes (teardrops, artwork), in the pictures only: 1 on TOP

## Text on the board
Ref Des/Silkscreen Bottom: DM | DP | ID | VCC | GND
Ref Des/Silkscreen Top: USB_PC | 1.8/3.3V | UART-TX/RX | VCC | GND | DM | DP | ID | USER_KEY1 | 2012-05-11 | TX | RX | KEY2 | KEY1 | BM | USER_KEY2 | AC-5V | HUB_DEBUG V2.0 | sudyboy_3w@163.com
NCLEGEND-1-2: FIGURE | SIZE | 11.811 | 23.618 | 31.496 | 35.429 | 35.433 | 37.402 | 45.276 | 62.988 | 125.0 | 98.425x39.37 | DRILL CHART: TOP to BOTTOM | ALL UNITS ARE IN MILS | PLATED | NON-PLATED | QTY | 195 | 16 | 4 | 21 | 8 | 2 | 1
